# Altium PCB FPv1.3.2.PcbDoc (part 6 of 9)
Units mm, origin at the board's own origin, x right, y up, seen from the top; angles counter-clockwise.
Board outline 81.28 x 53.34 mm, 4 copper layers (Top Layer, GROUND PLANE, POWER PLANE, Bottom Layer); 98 components, 183 nets, 614 pads, 312 vias.
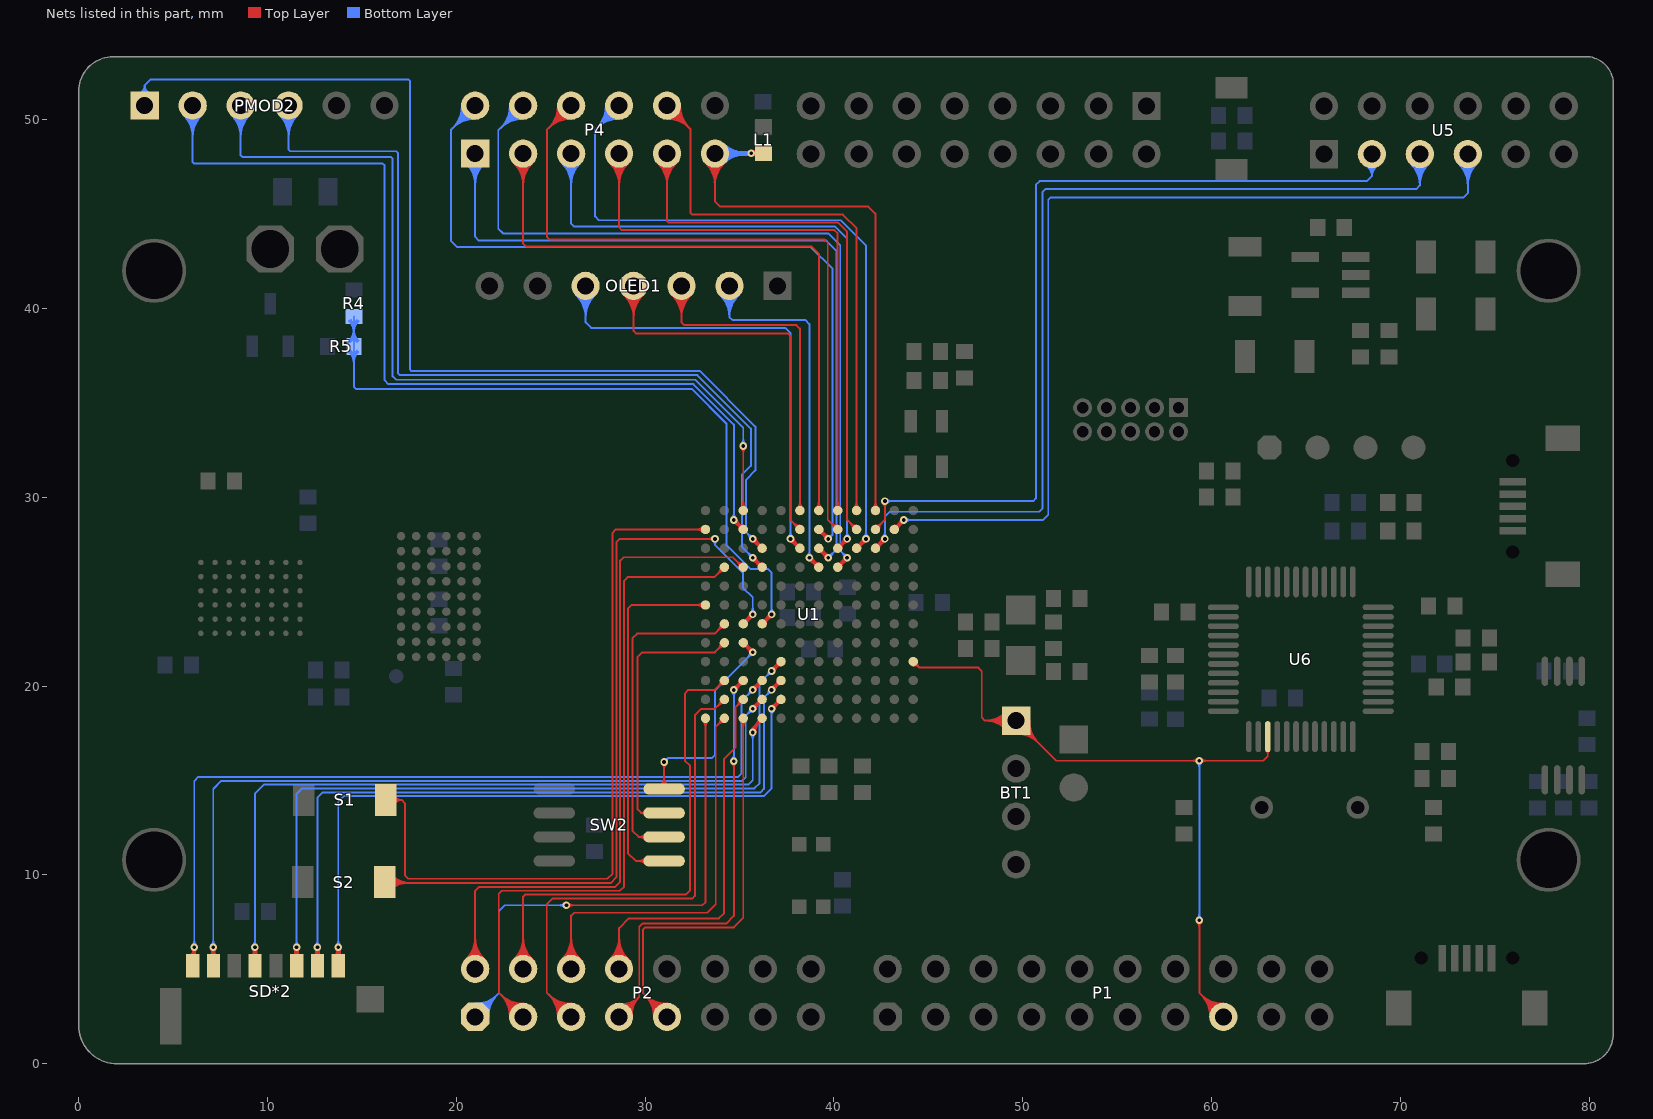
[diagram p8: the nets of this part, all layers, seen from the top]

## Via types
v1: diameter 0.403, hole 0.2, Top Layer to Bottom Layer, tented both sides, 261 vias
v2: diameter 0.503, hole 0.3, Top Layer to Bottom Layer, tented both sides, 25 vias
v3: diameter 0.6, hole 0.4, Top Layer to Bottom Layer, tented both sides, 11 vias
v4: diameter 0.508, hole 0.33, Top Layer to Bottom Layer, tented both sides, 5 vias
v5: diameter 0.703, hole 0.4, Top Layer to Bottom Layer, tented both sides, 3 vias
v6: diameter 0.603, hole 0.4, Top Layer to Bottom Layer, tented both sides, 2 vias
v7: diameter 0.503, hole 0.25, Top Layer to Bottom Layer, tented both sides, 2 vias
v8: diameter 0.6, hole 0.24, Top Layer to Bottom Layer, tented both sides, 1 vias
v9: diameter 0.508, hole 0.349, Top Layer to Bottom Layer, tented both sides, 1 vias
v10: diameter 0.603, hole 0.3, Top Layer to Bottom Layer, tented both sides, 1 vias

## Nets (pads, with @x,y where several pads share a name; then routed paths per layer and width w, separated by ;. In a path a pad name is that pad's centre, name@x,y a point inside that pad or via, vN(x,y) a via of type N, cw(c..) or ccw(c..) an arc to the next point about the centre after c; other vN are vias at no path point) (continued)
PTA15: U1.L11 U5.7 | length 62
  Top Layer w0.102: U1.L11@43.2,28.3 v1(43.7,28.8) ; U1.L11@43.2,28.499 ccw(c43.2,28.98) 43.54,28.64 ccw(c43.88,28.3) U1.L11@43.399,28.3 ; U1.L11@43.295,28.499 ccw(c43.018,28.979) v1@43.554,28.838 ; U1.L11@43.399,28.395 cw(c43.879,28.118) v1@43.738,28.654 ; 43.506,28.62 ccw(c43.349,28.892) v1@43.653,28.812 ; 43.511,28.623 ccw(c43.458,28.715) v1@43.558,28.75 ; 43.52,28.606 cw(c43.792,28.449) v1@43.712,28.753 ; 43.523,28.611 cw(c43.615,28.558) v1@43.65,28.658 ; v1@43.549,28.8 cw(c43.185,28.8) 43.443,28.543 cw(c43.7,28.285) v1@43.7,28.649 ; 43.537,28.638 cw(c43.619,28.496) 43.661,28.654 ccw(c43.619,28.496) 43.537,28.638 ; 43.538,28.637 ccw(c43.396,28.719) 43.554,28.761 cw(c43.396,28.719) 43.538,28.637
  Bottom Layer w0.102: v1(43.7,28.8) 51.076,28.8 51.35,29.074 51.35,45.762 51.463,45.875 73.332,45.875 73.57,46.113 U5.7@73.57,48.175 ; v1@43.807,28.693 cw(c44.064,28.436) 44.064,28.8 cw(c44.064,29.164) v1@43.807,28.907 ; U5.7@73.076,47.681 cw(c71.882,46.487) 73.57,46.487 cw(c75.258,46.487) U5.7@74.064,47.681 ; U5.7@73.147,47.752 cw(c72.127,46.732) 73.57,46.732 cw(c75.013,46.732) U5.7@73.993,47.752 ; U5.7@73.219,47.824 cw(c72.373,46.978) 73.57,46.978 cw(c74.767,46.978) U5.7@73.921,47.824 ; U5.7@73.291,47.896 cw(c72.618,47.223) 73.57,47.223 cw(c74.522,47.223) U5.7@73.849,47.896
PTA16: U1.K10 U5.5 | length 61.1
  Top Layer w0.102: U1.K10@42.2,27.3 v1(42.7,27.8) ; U1.K10@42.2,27.499 ccw(c42.2,27.98) 42.54,27.64 ccw(c42.88,27.3) U1.K10@42.399,27.3 ; U1.K10@42.295,27.499 ccw(c42.018,27.979) v1@42.554,27.838 ; U1.K10@42.399,27.395 cw(c42.879,27.118) v1@42.738,27.654 ; 42.506,27.62 ccw(c42.349,27.892) v1@42.653,27.812 ; 42.511,27.623 ccw(c42.458,27.715) v1@42.558,27.75 ; 42.52,27.606 cw(c42.792,27.449) v1@42.712,27.753 ; 42.523,27.611 cw(c42.615,27.558) v1@42.65,27.658 ; v1@42.549,27.8 cw(c42.185,27.8) 42.443,27.543 cw(c42.7,27.285) v1@42.7,27.649 ; 42.537,27.638 cw(c42.619,27.496) 42.661,27.654 ccw(c42.619,27.496) 42.537,27.638 ; 42.538,27.637 ccw(c42.396,27.719) 42.554,27.761 cw(c42.396,27.719) 42.538,27.637
  Bottom Layer w0.102: v1@42.593,27.907 ccw(c42.336,28.164) 42.7,28.164 ccw(c43.064,28.164) v1@42.807,27.907 ; v1(42.7,27.8) 42.7,28.984 42.951,29.235 50.876,29.235 51.054,29.413 51.054,46.177 51.202,46.325 70.836,46.325 71.03,46.519 ; U5.5@70.542,47.674 cw(c69.419,46.519) 71.03,46.519 ; U5.5@70.613,47.747 cw(c69.653,46.76) 71.03,46.76 cw(c72.407,46.76) U5.5@71.447,47.747 ; U5.5@70.684,47.82 cw(c69.887,47) 71.03,47 cw(c72.173,47) U5.5@71.376,47.82 ; U5.5@70.755,47.892 cw(c70.121,47.241) 71.03,47.241 cw(c71.939,47.241) U5.5@71.305,47.892 ; U5.5@71.03,48.175 71.03,46.519 ; U5.5@71.518,47.674 ccw(c72.641,46.519) 71.03,46.519
PTA17: U1.K11 U5.3 | length 50.8
  Top Layer w0.102: U1.K11@42.2,28.3 42.7,28.8 v1(42.7,29.8) ; U1.K11@42.2,28.499 ccw(c42.2,28.98) 42.54,28.64 ccw(c42.88,28.3) U1.K11@42.399,28.3 ; v1@42.593,29.693 cw(c42.336,29.436) 42.7,29.436 cw(c43.064,29.436) v1@42.807,29.693
  Bottom Layer w0.102: v1(42.7,29.8) 50.552,29.8 50.7,29.948 50.7,46.56 50.89,46.75 68.225,46.75 68.49,47.015 ; v1@42.807,29.693 cw(c43.064,29.436) 43.064,29.8 cw(c43.064,30.164) v1@42.807,29.907 ; U5.3@68.163,47.557 cw(c67.877,47.015) 68.49,47.015 ; U5.3@68.211,47.647 cw(c67.966,47.184) 68.49,47.184 cw(c69.014,47.184) U5.3@68.769,47.647 ; U5.3@68.258,47.736 cw(c68.055,47.352) 68.49,47.352 cw(c68.925,47.352) U5.3@68.722,47.736 ; U5.3@68.49,48.175 68.49,47.015 ; U5.3@68.817,47.557 ccw(c69.103,47.015) 68.49,47.015
PTA24: L1.1 P4.11 U1.K12 | length 43.5
  Top Layer w0.102: P4.11@33.207,47.711 cw(c32.013,46.517) 33.701,46.517 cw(c35.389,46.517) P4.11@34.195,47.711 ; P4.11@33.278,47.782 cw(c32.258,46.762) 33.701,46.762 cw(c35.144,46.762) P4.11@34.124,47.782 ; P4.11@33.35,47.854 cw(c32.504,47.008) 33.701,47.008 cw(c34.898,47.008) P4.11@34.052,47.854 ; P4.11@33.422,47.926 cw(c32.749,47.253) 33.701,47.253 cw(c34.653,47.253) P4.11@33.98,47.926 ; P4.11@33.701,48.205 33.701,45.674 33.975,45.4 41.825,45.4 42.2,45.025 U1.K12@42.2,29.3 ; U1.K12@42.059,29.441 ccw(c41.719,29.781) 42.2,29.781 ccw(c42.681,29.781) U1.K12@42.341,29.441
  Top Layer w0.254: L1.1@36.019,48.046 ccw(c35.625,47.702) v1(35.625,48.225) ; L1.1@36.019,48.404 cw(c35.625,48.748) v1(35.625,48.225) ; L1.1@36.275,48.225 v1(35.625,48.225)
  Bottom Layer w0.254: P4.11@33.701,48.205 v1@35.605,48.205 ; P4.11@33.962,47.944 cw(c34.592,47.314) 34.592,48.205 cw(c34.592,49.096) P4.11@33.962,48.466 ; P4.11@34.142,47.764 cw(c35.205,46.701) 35.205,48.205 cw(c35.205,49.709) P4.11@34.142,48.646 ; 35.397,48.205 ccw(c35.397,48.453) v1@35.572,48.278
PTA25: P4.10 U1.J12 | length 39.3
  Top Layer w0.102: P4.10@31.161,50.046 cw(c31.161,48.358) 32.355,49.551 cw(c33.548,50.745) P4.10@31.86,50.745 ; P4.10@31.161,50.147 cw(c31.161,48.705) 32.181,49.725 cw(c33.201,50.745) P4.10@31.759,50.745 ; P4.10@31.161,50.249 cw(c31.161,49.052) 32.008,49.898 cw(c32.854,50.745) P4.10@31.657,50.745 ; P4.10@31.161,50.351 cw(c31.161,49.398) 31.834,50.072 cw(c32.508,50.745) P4.10@31.555,50.745 ; P4.10@31.161,50.745 32.4,49.506 32.4,45.075 32.5,44.975 40.475,44.975 41.2,44.25 U1.J12@41.2,29.3 ; U1.J12@41.059,29.441 ccw(c40.719,29.781) 41.2,29.781 ccw(c41.681,29.781) U1.J12@41.341,29.441
PTA26: P4.9 U1.J11 | length 38.4
  Top Layer w0.102: P4.9@30.667,47.711 cw(c29.473,46.517) 31.161,46.517 cw(c32.849,46.517) P4.9@31.655,47.711 ; P4.9@30.738,47.782 cw(c29.718,46.762) 31.161,46.762 cw(c32.604,46.762) P4.9@31.584,47.782 ; P4.9@30.81,47.854 cw(c29.964,47.008) 31.161,47.008 cw(c32.358,47.008) P4.9@31.512,47.854 ; P4.9@30.882,47.926 cw(c30.209,47.253) 31.161,47.253 cw(c32.113,47.253) P4.9@31.44,47.926 ; P4.9@31.161,48.205 31.161,44.633 31.244,44.55 40.225,44.55 40.7,44.075 40.7,28.8 U1.J11@41.2,28.3 ; U1.J11@41.001,28.3 ccw(c40.52,28.3) 40.86,28.64 ccw(c41.2,28.98) U1.J11@41.2,28.499
PTA27: P4.8 U1.J10 | length 50
  Top Layer w0.102: U1.J10@41.2,27.3 v1(41.7,27.8) ; U1.J10@41.2,27.499 ccw(c41.2,27.98) 41.54,27.64 ccw(c41.88,27.3) U1.J10@41.399,27.3 ; U1.J10@41.295,27.499 ccw(c41.018,27.979) v1@41.554,27.838 ; U1.J10@41.399,27.395 cw(c41.879,27.118) v1@41.738,27.654 ; 41.506,27.62 ccw(c41.349,27.892) v1@41.653,27.812 ; 41.511,27.623 ccw(c41.458,27.715) v1@41.558,27.75 ; 41.52,27.606 cw(c41.792,27.449) v1@41.712,27.753 ; 41.523,27.611 cw(c41.615,27.558) v1@41.65,27.658 ; v1@41.549,27.8 cw(c41.185,27.8) 41.443,27.543 cw(c41.7,27.285) v1@41.7,27.649 ; 41.537,27.638 cw(c41.619,27.496) 41.661,27.654 ccw(c41.619,27.496) 41.537,27.638 ; 41.538,27.637 ccw(c41.396,27.719) 41.554,27.761 cw(c41.396,27.719) 41.538,27.637
  Bottom Layer w0.102: P4.8@27.922,50.745 cw(c26.234,50.745) 27.427,49.551 cw(c28.621,48.358) P4.8@28.621,50.046 ; P4.8@28.023,50.745 cw(c26.581,50.745) 27.601,49.725 cw(c28.621,48.705) P4.8@28.621,50.147 ; P4.8@28.125,50.745 cw(c26.928,50.745) 27.774,49.898 cw(c28.621,49.052) P4.8@28.621,50.249 ; P4.8@28.227,50.745 cw(c27.274,50.745) 27.948,50.072 cw(c28.621,49.398) P4.8@28.621,50.351 ; P4.8@28.621,50.745 27.35,49.474 27.35,44.875 27.55,44.675 40.35,44.675 41.7,43.325 v1(41.7,27.8) ; v1@41.593,27.907 ccw(c41.336,28.164) 41.7,28.164 ccw(c42.064,28.164) v1@41.807,27.907
PTA28: P4.7 U1.H12 | length 39.3
  Top Layer w0.102: P4.7@28.127,47.711 cw(c26.933,46.517) 28.621,46.517 cw(c30.309,46.517) P4.7@29.115,47.711 ; P4.7@28.198,47.782 cw(c27.178,46.762) 28.621,46.762 cw(c30.064,46.762) P4.7@29.044,47.782 ; P4.7@28.27,47.854 cw(c27.424,47.008) 28.621,47.008 cw(c29.818,47.008) P4.7@28.972,47.854 ; P4.7@28.342,47.926 cw(c27.669,47.253) 28.621,47.253 cw(c29.573,47.253) P4.7@28.9,47.926 ; P4.7@28.621,48.205 28.621,44.304 28.775,44.15 40.025,44.15 40.2,43.975 U1.H12@40.2,29.3 ; U1.H12@40.059,29.441 ccw(c39.719,29.781) 40.2,29.781 ccw(c40.681,29.781) U1.H12@40.341,29.441
PTA29: P4.6 U1.H11 | length 46.9
  Top Layer w0.102: P4.6@25.382,50.745 cw(c23.694,50.745) 24.887,49.551 cw(c26.081,48.358) P4.6@26.081,50.046 ; P4.6@25.483,50.745 cw(c24.041,50.745) 25.061,49.725 cw(c26.081,48.705) P4.6@26.081,50.147 ; P4.6@25.585,50.745 cw(c24.388,50.745) 25.234,49.898 cw(c26.081,49.052) P4.6@26.081,50.249 ; P4.6@25.687,50.745 cw(c24.734,50.745) 25.408,50.072 cw(c26.081,49.398) P4.6@26.081,50.351 ; P4.6@26.081,50.745 24.8,49.464 24.8,43.805 24.955,43.65 39.5,43.65 39.675,43.475 39.675,28.825 U1.H11@40.2,28.3 ; U1.H11@40.001,28.3 ccw(c39.52,28.3) 39.86,28.64 ccw(c40.2,28.98) U1.H11@40.2,28.499
PTB0: P4.5 U1.H10 | length 47.6
  Top Layer w0.102: U1.H10@40.2,27.3 v1(40.7,27.8) ; U1.H10@40.2,27.499 ccw(c40.2,27.98) 40.54,27.64 ccw(c40.88,27.3) U1.H10@40.399,27.3 ; U1.H10@40.295,27.499 ccw(c40.018,27.979) v1@40.554,27.838 ; U1.H10@40.399,27.395 cw(c40.879,27.118) v1@40.738,27.654 ; 40.506,27.62 ccw(c40.349,27.892) v1@40.653,27.812 ; 40.511,27.623 ccw(c40.458,27.715) v1@40.558,27.75 ; 40.52,27.606 cw(c40.792,27.449) v1@40.712,27.753 ; 40.523,27.611 cw(c40.615,27.558) v1@40.65,27.658 ; v1@40.549,27.8 cw(c40.185,27.8) 40.443,27.543 cw(c40.7,27.285) v1@40.7,27.649 ; 40.537,27.638 cw(c40.619,27.496) 40.661,27.654 ccw(c40.619,27.496) 40.537,27.638 ; 40.538,27.637 ccw(c40.396,27.719) 40.554,27.761 cw(c40.396,27.719) 40.538,27.637
  Bottom Layer w0.102: P4.5@25.587,47.711 cw(c24.393,46.517) 26.081,46.517 cw(c27.769,46.517) P4.5@26.575,47.711 ; P4.5@25.658,47.782 cw(c24.638,46.762) 26.081,46.762 cw(c27.524,46.762) P4.5@26.504,47.782 ; P4.5@25.73,47.854 cw(c24.884,47.008) 26.081,47.008 cw(c27.278,47.008) P4.5@26.432,47.854 ; P4.5@25.802,47.926 cw(c25.129,47.253) 26.081,47.253 cw(c27.033,47.253) P4.5@26.36,47.926 ; P4.5@26.081,48.205 26.081,44.494 26.225,44.35 40.05,44.35 40.7,43.7 v1(40.7,27.8) ; v1@40.593,27.907 ccw(c40.336,28.164) 40.7,28.164 ccw(c41.064,28.164) v1@40.807,27.907
PTB1: P4.4 U1.H9 | length 55.3
  Top Layer w0.102: U1.H9@40.2,26.3 v1(40.7,26.8) ; U1.H9@40.2,26.499 ccw(c40.2,26.98) 40.54,26.64 ccw(c40.88,26.3) U1.H9@40.399,26.3 ; U1.H9@40.295,26.499 ccw(c40.018,26.979) v1@40.554,26.838 ; U1.H9@40.399,26.395 cw(c40.879,26.118) v1@40.738,26.654 ; 40.506,26.62 ccw(c40.349,26.892) v1@40.653,26.812 ; 40.511,26.623 ccw(c40.458,26.715) v1@40.558,26.75 ; 40.52,26.606 cw(c40.792,26.449) v1@40.712,26.753 ; 40.523,26.611 cw(c40.615,26.558) v1@40.65,26.658 ; v1@40.549,26.8 cw(c40.185,26.8) 40.443,26.543 cw(c40.7,26.285) v1@40.7,26.649 ; 40.537,26.638 cw(c40.619,26.496) 40.661,26.654 ccw(c40.619,26.496) 40.537,26.638 ; 40.538,26.637 ccw(c40.396,26.719) 40.554,26.761 cw(c40.396,26.719) 40.538,26.637
  Bottom Layer w0.102: P4.4@22.842,50.745 cw(c21.154,50.745) 22.347,49.551 cw(c23.541,48.358) P4.4@23.541,50.046 ; P4.4@22.943,50.745 cw(c21.501,50.745) 22.521,49.725 cw(c23.541,48.705) P4.4@23.541,50.147 ; P4.4@23.045,50.745 cw(c21.848,50.745) 22.694,49.898 cw(c23.541,49.052) P4.4@23.541,50.249 ; P4.4@23.147,50.745 cw(c22.194,50.745) 22.868,50.072 cw(c23.541,49.398) P4.4@23.541,50.351 ; P4.4@23.541,50.745 22.225,49.429 22.225,44.225 22.475,43.975 39.7,43.975 40.335,43.34 40.335,27.165 v1(40.7,26.8) ; v1@40.549,26.8 ccw(c40.185,26.8) 40.443,27.057 ccw(c40.7,27.315) v1@40.7,26.951
PTB2: P4.3 U1.G12 | length 43.3
  Top Layer w0.102: P4.3@23.047,47.711 cw(c21.853,46.517) 23.541,46.517 cw(c25.229,46.517) P4.3@24.035,47.711 ; P4.3@23.118,47.782 cw(c22.098,46.762) 23.541,46.762 cw(c24.984,46.762) P4.3@23.964,47.782 ; P4.3@23.19,47.854 cw(c22.344,47.008) 23.541,47.008 cw(c24.738,47.008) P4.3@23.892,47.854 ; P4.3@23.262,47.926 cw(c22.589,47.253) 23.541,47.253 cw(c24.493,47.253) P4.3@23.82,47.926 ; P4.3@23.541,48.205 23.541,43.439 23.705,43.275 38.825,43.275 39.2,42.9 U1.G12@39.2,29.3 ; U1.G12@39.059,29.441 ccw(c38.719,29.781) 39.2,29.781 ccw(c39.681,29.781) U1.G12@39.341,29.441
PTB3: P4.2 U1.G11 | length 55.9
  Top Layer w0.102: U1.G11@39.2,28.101 cw(c39.2,27.62) 39.54,27.96 cw(c39.88,28.3) U1.G11@39.399,28.3 ; U1.G11@39.2,28.3 v1(39.7,27.8) ; U1.G11@39.295,28.101 cw(c39.018,27.621) v1@39.554,27.762 ; U1.G11@39.399,28.205 ccw(c39.879,28.482) v1@39.738,27.946 ; 39.506,27.98 cw(c39.349,27.708) v1@39.653,27.788 ; 39.511,27.977 cw(c39.458,27.885) v1@39.558,27.85 ; 39.52,27.994 ccw(c39.792,28.151) v1@39.712,27.847 ; 39.523,27.989 ccw(c39.615,28.042) v1@39.65,27.942 ; v1@39.549,27.8 ccw(c39.185,27.8) 39.443,28.057 ccw(c39.7,28.315) v1@39.7,27.951 ; 39.537,27.962 ccw(c39.619,28.104) 39.661,27.946 cw(c39.619,28.104) 39.537,27.962 ; 39.538,27.963 cw(c39.396,27.881) 39.554,27.839 ccw(c39.396,27.881) 39.538,27.963
  Bottom Layer w0.102: P4.2@20.302,50.745 cw(c18.614,50.745) 19.807,49.551 cw(c21.001,48.358) P4.2@21.001,50.046 ; P4.2@20.403,50.745 cw(c18.961,50.745) 19.981,49.725 cw(c21.001,48.705) P4.2@21.001,50.147 ; P4.2@20.505,50.745 cw(c19.308,50.745) 20.154,49.898 cw(c21.001,49.052) P4.2@21.001,50.249 ; P4.2@20.607,50.745 cw(c19.654,50.745) 20.328,50.072 cw(c21.001,49.398) P4.2@21.001,50.351 ; P4.2@21.001,50.745 19.725,49.469 19.725,43.575 20.05,43.25 38.775,43.25 39.929,42.096 39.929,28.029 ; v1(39.7,27.8) 39.929,28.029 ; v1@39.713,27.95 ccw(c39.736,28.221) 39.929,28.029 ; v1@39.85,27.813 cw(c40.121,27.836) 39.929,28.029
PTB4: P4.1 U1.G10 | length 53.4
  Top Layer w0.102: U1.G10@39.2,27.101 cw(c39.2,26.62) 39.54,26.96 cw(c39.88,27.3) U1.G10@39.399,27.3 ; U1.G10@39.2,27.3 v1(39.7,26.8) ; U1.G10@39.295,27.101 cw(c39.018,26.621) v1@39.554,26.762 ; U1.G10@39.399,27.205 ccw(c39.879,27.482) v1@39.738,26.946 ; 39.506,26.98 cw(c39.349,26.708) v1@39.653,26.788 ; 39.511,26.977 cw(c39.458,26.885) v1@39.558,26.85 ; 39.52,26.994 ccw(c39.792,27.151) v1@39.712,26.847 ; 39.523,26.989 ccw(c39.615,27.042) v1@39.65,26.942 ; v1@39.549,26.8 ccw(c39.185,26.8) 39.443,27.057 ccw(c39.7,27.315) v1@39.7,26.951 ; 39.537,26.962 ccw(c39.619,27.104) 39.661,26.946 cw(c39.619,27.104) 39.537,26.962 ; 39.538,26.963 cw(c39.396,26.881) 39.554,26.839 ccw(c39.396,26.881) 39.538,26.963
  Bottom Layer w0.102: P4.1@20.507,47.711 cw(c19.313,46.517) 21.001,46.517 cw(c22.689,46.517) P4.1@21.495,47.711 ; P4.1@20.578,47.782 cw(c19.558,46.762) 21.001,46.762 cw(c22.444,46.762) P4.1@21.424,47.782 ; P4.1@20.65,47.854 cw(c19.804,47.008) 21.001,47.008 cw(c22.198,47.008) P4.1@21.352,47.854 ; P4.1@20.722,47.926 cw(c20.049,47.253) 21.001,47.253 cw(c21.953,47.253) P4.1@21.28,47.926 ; P4.1@21.001,48.205 21.001,43.799 21.2,43.6 39.6,43.6 40.132,43.068 40.132,27.232 v1(39.7,26.8) ; v1@39.7,26.951 ccw(c39.7,27.315) 39.957,27.057 ccw(c40.215,26.8) v1@39.851,26.8
PTB5: OLED1.2 U1.G9 | length 31.2
  Top Layer w0.102: v1@38.662,26.654 cw(c38.521,26.118) U1.G9@39.001,26.395 ; v1@38.688,26.753 cw(c38.608,26.449) 38.88,26.606 ; v1@38.7,26.649 cw(c38.7,26.285) 38.957,26.543 cw(c39.215,26.8) v1@38.851,26.8 ; v1(38.7,26.8) U1.G9@39.2,26.3 ; v1@38.747,26.812 ccw(c39.051,26.892) 38.894,26.62 ; v1@38.75,26.658 cw(c38.785,26.558) 38.877,26.611 ; v1@38.842,26.75 ccw(c38.942,26.715) 38.889,26.623 ; v1@38.846,26.838 ccw(c39.382,26.979) U1.G9@39.105,26.499 ; U1.G9@39.001,26.3 ccw(c38.52,26.3) 38.86,26.64 ccw(c39.2,26.98) U1.G9@39.2,26.499 ; v1@38.739,26.654 cw(c38.781,26.496) 38.863,26.638 ccw(c38.781,26.496) v1@38.739,26.654 ; v1@38.846,26.761 ccw(c39.004,26.719) 38.862,26.637 cw(c39.004,26.719) v1@38.846,26.761
  Bottom Layer w0.102: OLED1.2@33.981,40.697 cw(c32.868,39.548) 34.468,39.548 ; OLED1.2@34.052,40.77 cw(c33.101,39.788) 34.468,39.788 cw(c35.835,39.788) OLED1.2@34.884,40.77 ; OLED1.2@34.123,40.843 cw(c33.333,40.028) 34.468,40.028 cw(c35.602,40.028) OLED1.2@34.813,40.843 ; OLED1.2@34.193,40.916 cw(c33.566,40.268) 34.468,40.268 cw(c35.37,40.268) OLED1.2@34.742,40.916 ; OLED1.2@34.468,41.199 34.468,39.548 ; OLED1.2@34.954,40.697 ccw(c36.067,39.548) 34.468,39.548 ; v1@38.593,26.907 ccw(c38.336,27.164) 38.7,27.164 ccw(c39.064,27.164) v1@38.807,26.907 ; v1(38.7,26.8) 38.7,39.175 38.475,39.4 34.616,39.4 34.468,39.548
PTB6: OLED1.3 U1.F12 | length 27
  Top Layer w0.102: OLED1.3@31.433,40.704 cw(c30.24,39.511) 31.928,39.511 cw(c33.616,39.511) OLED1.3@32.422,40.704 ; OLED1.3@31.505,40.776 cw(c30.485,39.756) 31.928,39.756 cw(c33.371,39.756) OLED1.3@32.35,40.776 ; OLED1.3@31.577,40.848 cw(c30.73,40.001) 31.928,40.001 cw(c33.125,40.001) OLED1.3@32.279,40.848 ; OLED1.3@31.649,40.92 cw(c30.976,40.247) 31.928,40.247 cw(c32.88,40.247) OLED1.3@32.207,40.92 ; OLED1.3@31.928,41.199 31.928,39.268 32.071,39.125 38.015,39.125 38.2,38.94 U1.F12@38.2,29.3 ; U1.F12@38.059,29.441 ccw(c37.719,29.781) 38.2,29.781 ccw(c38.681,29.781) U1.F12@38.341,29.441
PTB7: OLED1.4 U1.F11 | length 30.3
  Top Layer w0.102: OLED1.4@28.893,40.704 cw(c27.7,39.511) 29.388,39.511 cw(c31.076,39.511) OLED1.4@29.882,40.704 ; OLED1.4@28.965,40.776 cw(c27.945,39.756) 29.388,39.756 cw(c30.831,39.756) OLED1.4@29.81,40.776 ; OLED1.4@29.037,40.848 cw(c28.19,40.001) 29.388,40.001 cw(c30.585,40.001) OLED1.4@29.739,40.848 ; OLED1.4@29.109,40.92 cw(c28.436,40.247) 29.388,40.247 cw(c30.34,40.247) OLED1.4@29.667,40.92 ; OLED1.4@29.388,41.199 29.388,38.811 29.524,38.675 37.576,38.675 37.7,38.551 37.7,28.8 U1.F11@38.2,28.3 ; U1.F11@38.001,28.3 ccw(c37.52,28.3) 37.86,28.64 ccw(c38.2,28.98) U1.F11@38.2,28.499
PTB8: OLED1.5 U1.F10 | length 37
  Top Layer w0.102: v1@37.662,27.654 cw(c37.521,27.118) U1.F10@38.001,27.395 ; v1@37.688,27.753 cw(c37.608,27.449) 37.88,27.606 ; v1@37.7,27.649 cw(c37.7,27.285) 37.957,27.543 cw(c38.215,27.8) v1@37.851,27.8 ; v1(37.7,27.8) U1.F10@38.2,27.3 ; v1@37.747,27.812 ccw(c38.051,27.892) 37.894,27.62 ; v1@37.75,27.658 cw(c37.785,27.558) 37.877,27.611 ; v1@37.842,27.75 ccw(c37.942,27.715) 37.889,27.623 ; v1@37.846,27.838 ccw(c38.382,27.979) U1.F10@38.105,27.499 ; U1.F10@38.001,27.3 ccw(c37.52,27.3) 37.86,27.64 ccw(c38.2,27.98) U1.F10@38.2,27.499 ; v1@37.739,27.654 cw(c37.781,27.496) 37.863,27.638 ccw(c37.781,27.496) v1@37.739,27.654 ; v1@37.846,27.761 ccw(c38.004,27.719) 37.862,27.637 cw(c38.004,27.719) v1@37.846,27.761
  Bottom Layer w0.102: OLED1.5@26.353,40.704 cw(c25.16,39.511) 26.848,39.511 cw(c28.536,39.511) OLED1.5@27.342,40.704 ; OLED1.5@26.425,40.776 cw(c25.405,39.756) 26.848,39.756 cw(c28.291,39.756) OLED1.5@27.27,40.776 ; OLED1.5@26.497,40.848 cw(c25.65,40.001) 26.848,40.001 cw(c28.045,40.001) OLED1.5@27.199,40.848 ; OLED1.5@26.569,40.92 cw(c25.896,40.247) 26.848,40.247 cw(c27.8,40.247) OLED1.5@27.127,40.92 ; OLED1.5@26.848,41.199 26.848,39.268 27.141,38.975 37.428,38.975 37.7,38.703 v1(37.7,27.8) ; v1@37.593,27.907 ccw(c37.336,28.164) 37.7,28.164 ccw(c38.064,28.164) v1@37.807,27.907
PTB20: PMOD2.1 U1.D10 | length 64
  Top Layer w0.102: v1@35.662,27.654 cw(c35.521,27.118) U1.D10@36.001,27.395 ; v1@35.688,27.753 cw(c35.608,27.449) 35.88,27.606 ; v1@35.7,27.649 cw(c35.7,27.285) 35.957,27.543 cw(c36.215,27.8) v1@35.851,27.8 ; v1(35.7,27.8) U1.D10@36.2,27.3 ; v1@35.747,27.812 ccw(c36.051,27.892) 35.894,27.62 ; v1@35.75,27.658 cw(c35.785,27.558) 35.877,27.611 ; v1@35.842,27.75 ccw(c35.942,27.715) 35.889,27.623 ; v1@35.846,27.838 ccw(c36.382,27.979) U1.D10@36.105,27.499 ; U1.D10@36.001,27.3 ccw(c35.52,27.3) 35.86,27.64 ccw(c36.2,27.98) U1.D10@36.2,27.499 ; v1@35.739,27.654 cw(c35.781,27.496) 35.863,27.638 ccw(c35.781,27.496) v1@35.739,27.654 ; v1@35.846,27.761 ccw(c36.004,27.719) 35.862,27.637 cw(c36.004,27.719) v1@35.846,27.761
  Bottom Layer w0.102: PMOD2.1@3.217,51.389 ccw(c3.023,51.825) 3.5,51.825 ; PMOD2.1@3.258,51.296 ccw(c3.093,51.669) 3.5,51.669 ccw(c3.907,51.669) PMOD2.1@3.742,51.296 ; PMOD2.1@3.299,51.203 ccw(c3.162,51.513) 3.5,51.513 ccw(c3.838,51.513) PMOD2.1@3.701,51.203 ; PMOD2.1@3.5,50.75 3.5,51.825 ; PMOD2.1@3.783,51.389 cw(c3.977,51.825) 3.5,51.825 ; v1@35.549,27.8 ccw(c35.185,27.8) 35.443,28.057 ccw(c35.7,28.315) v1@35.7,27.951 ; v1(35.7,27.8) 35.346,28.154 35.346,30.926 35.846,31.426 35.846,33.75 32.896,36.7 17.605,36.7 17.55,36.755 17.55,52.046 17.471,52.125 3.8,52.125 3.5,51.825
PTB21: PMOD2.4 U1.D9 | length 60.1
  Top Layer w0.102: v1@35.662,26.654 cw(c35.521,26.118) U1.D9@36.001,26.395 ; v1@35.688,26.753 cw(c35.608,26.449) 35.88,26.606 ; v1@35.7,26.649 cw(c35.7,26.285) 35.957,26.543 cw(c36.215,26.8) v1@35.851,26.8 ; v1(35.7,26.8) U1.D9@36.2,26.3 ; v1@35.747,26.812 ccw(c36.051,26.892) 35.894,26.62 ; v1@35.75,26.658 cw(c35.785,26.558) 35.877,26.611 ; v1@35.842,26.75 ccw(c35.942,26.715) 35.889,26.623 ; v1@35.846,26.838 ccw(c36.382,26.979) U1.D9@36.105,26.499 ; U1.D9@36.001,26.3 ccw(c35.52,26.3) 35.86,26.64 ccw(c36.2,26.98) U1.D9@36.2,26.499 ; v1@35.739,26.654 cw(c35.781,26.496) 35.863,26.638 ccw(c35.781,26.496) v1@35.739,26.654 ; v1@35.846,26.761 ccw(c36.004,26.719) 35.862,26.637 cw(c36.004,26.719) v1@35.846,26.761
  Bottom Layer w0.102: PMOD2.4@10.626,50.256 cw(c9.432,49.062) 11.12,49.062 cw(c12.808,49.062) PMOD2.4@11.614,50.256 ; PMOD2.4@10.697,50.327 cw(c9.677,49.307) 11.12,49.307 cw(c12.563,49.307) PMOD2.4@11.543,50.327 ; PMOD2.4@10.769,50.399 cw(c9.923,49.553) 11.12,49.553 cw(c12.317,49.553) PMOD2.4@11.471,50.399 ; PMOD2.4@10.841,50.471 cw(c10.168,49.798) 11.12,49.798 cw(c12.072,49.798) PMOD2.4@11.399,50.471 ; PMOD2.4@11.12,50.75 11.12,48.418 11.209,48.328 16.823,48.328 16.925,48.226 16.925,36.567 17.017,36.475 32.765,36.475 35.6,33.64 35.6,31.663 35.128,31.191 35.128,27.372 v1(35.7,26.8) ; v1@35.549,26.8 ccw(c35.185,26.8) 35.443,27.057 ccw(c35.7,27.315) v1@35.7,26.951
PTB22: PMOD2.3 U1.C12 | length 56.6
  Top Layer w0.102: U1.C12@35.059,29.441 ccw(c34.719,29.781) 35.2,29.781 ccw(c35.681,29.781) U1.C12@35.341,29.441 ; v1@35.093,32.613 cw(c34.836,32.356) 35.2,32.356 cw(c35.564,32.356) v1@35.307,32.613 ; U1.C12@35.2,29.3 v1(35.2,32.72)
  Bottom Layer w0.102: PMOD2.3@8.086,50.256 cw(c6.892,49.062) 8.58,49.062 cw(c10.268,49.062) PMOD2.3@9.074,50.256 ; PMOD2.3@8.157,50.327 cw(c7.137,49.307) 8.58,49.307 cw(c10.023,49.307) PMOD2.3@9.003,50.327 ; PMOD2.3@8.229,50.399 cw(c7.383,49.553) 8.58,49.553 cw(c9.777,49.553) PMOD2.3@8.931,50.399 ; PMOD2.3@8.301,50.471 cw(c7.628,49.798) 8.58,49.798 cw(c9.532,49.798) PMOD2.3@8.859,50.471 ; PMOD2.3@8.58,50.75 8.58,48.113 8.668,48.025 16.542,48.025 16.625,47.942 16.625,36.41 16.81,36.225 32.66,36.225 35.2,33.685 v1(35.2,32.72) ; v1@35.093,32.826 ccw(c34.836,33.083) 35.2,33.083 ccw(c35.564,33.083) v1@35.307,32.826
PTB23: PMOD2.2 U1.C11 | length 62.2
  Top Layer w0.102: v1@34.662,28.654 cw(c34.521,28.118) U1.C11@35.001,28.395 ; v1@34.688,28.753 cw(c34.608,28.449) 34.88,28.606 ; v1@34.7,28.649 cw(c34.7,28.285) 34.957,28.543 cw(c35.215,28.8) v1@34.851,28.8 ; v1(34.7,28.8) U1.C11@35.2,28.3 ; v1@34.747,28.812 ccw(c35.051,28.892) 34.894,28.62 ; v1@34.75,28.658 cw(c34.785,28.558) 34.877,28.611 ; v1@34.842,28.75 ccw(c34.942,28.715) 34.889,28.623 ; v1@34.846,28.838 ccw(c35.382,28.979) U1.C11@35.105,28.499 ; U1.C11@35.001,28.3 ccw(c34.52,28.3) 34.86,28.64 ccw(c35.2,28.98) U1.C11@35.2,28.499 ; v1@34.739,28.654 cw(c34.781,28.496) 34.863,28.638 ccw(c34.781,28.496) v1@34.739,28.654 ; v1@34.846,28.761 ccw(c35.004,28.719) 34.862,28.637 cw(c35.004,28.719) v1@34.846,28.761
  Bottom Layer w0.102: PMOD2.2@5.546,50.256 cw(c4.352,49.062) 6.04,49.062 cw(c7.728,49.062) PMOD2.2@6.534,50.256 ; PMOD2.2@5.617,50.327 cw(c4.597,49.307) 6.04,49.307 cw(c7.483,49.307) PMOD2.2@6.463,50.327 ; PMOD2.2@5.689,50.399 cw(c4.843,49.553) 6.04,49.553 cw(c7.237,49.553) PMOD2.2@6.391,50.399 ; PMOD2.2@5.761,50.471 cw(c5.088,49.798) 6.04,49.798 cw(c6.992,49.798) PMOD2.2@6.319,50.471 ; PMOD2.2@6.04,50.75 6.04,47.757 6.122,47.675 16.104,47.675 16.2,47.579 16.2,36.2 16.4,36 32.555,36 34.7,33.855 v1(34.7,28.8) ; v1@34.593,28.907 ccw(c34.336,29.164) 34.7,29.164 ccw(c35.064,29.164) v1@34.807,28.907
PTC3: S1.1 U1.A11 | length 41.5
  Top Layer w0.102: S1.1@16.266,13.975 17.1,13.975 ; S1.1@16.647,13.792 cw(c16.938,13.651) 16.938,13.975 cw(c16.938,14.299) S1.1@16.647,14.158 ; S1.1@16.738,13.748 cw(c17.1,13.574) 17.1,13.975 ; S1.1@16.738,14.202 ccw(c17.1,14.376) 17.1,13.975 ; U1.A11@33.059,28.159 ccw(c32.719,27.819) 32.719,28.3 ccw(c32.719,28.781) U1.A11@33.059,28.441 ; U1.A11@33.2,28.3 28.452,28.3 28.275,28.123 28.275,10.075 28,9.8 17.45,9.8 17.275,9.975 17.275,13.8 17.1,13.975
PTC12: SW2.5 U1.A7 | length 21.5
  Top Layer w0.102: SW2.5@30.032,10.569 ccw(c29.606,10.143) 29.606,10.745 ccw(c29.606,11.347) SW2.5@30.032,10.921 ; SW2.5@30.104,10.641 ccw(c29.852,10.389) 29.852,10.745 ccw(c29.852,11.101) SW2.5@30.104,10.849 ; SW2.5@31.008,10.745 29.505,10.745 29.088,11.162 29.088,24.103 29.285,24.3 U1.A7@33.2,24.3 ; U1.A7@33.059,24.159 ccw(c32.719,23.819) 32.719,24.3 ccw(c32.719,24.781) U1.A7@33.059,24.441
PTC13: R4.2 R5.2 U1.D6 | length 47.5
  Top Layer w0.102: U1.D6@36.2,23.3 v1(36.7,23.8) ; U1.D6@36.2,23.499 ccw(c36.2,23.98) 36.54,23.64 ccw(c36.88,23.3) U1.D6@36.399,23.3 ; U1.D6@36.295,23.499 ccw(c36.018,23.979) v1@36.554,23.838 ; U1.D6@36.399,23.395 cw(c36.879,23.118) v1@36.738,23.654 ; 36.506,23.62 ccw(c36.349,23.892) v1@36.653,23.812 ; 36.511,23.623 ccw(c36.458,23.715) v1@36.558,23.75 ; 36.52,23.606 cw(c36.792,23.449) v1@36.712,23.753 ; 36.523,23.611 cw(c36.615,23.558) v1@36.65,23.658 ; v1@36.549,23.8 cw(c36.185,23.8) 36.443,23.543 cw(c36.7,23.285) v1@36.7,23.649 ; 36.537,23.638 cw(c36.619,23.496) 36.661,23.654 ccw(c36.619,23.496) 36.537,23.638 ; 36.538,23.637 ccw(c36.396,23.719) 36.554,23.761 cw(c36.396,23.719) 36.538,23.637
  Bottom Layer w0.102: R5.2@14.328,37.703 cw(c13.732,37.107) 14.575,37.107 cw(c15.418,37.107) R5.2@14.822,37.703 ; R5.2@14.328,38.297 ccw(c13.732,38.893) 14.575,38.893 ccw(c15.418,38.893) R5.2@14.822,38.297 ; R4.2@14.328,39.328 cw(c13.732,38.732) 14.575,38.732 cw(c15.418,38.732) R4.2@14.822,39.328 ; R5.2@14.4,37.775 cw(c13.977,37.352) 14.575,37.352 cw(c15.173,37.352) R5.2@14.75,37.775 ; R5.2@14.4,38.225 ccw(c13.977,38.648) 14.575,38.648 ccw(c15.173,38.648) R5.2@14.75,38.225 ; R4.2@14.4,39.4 cw(c13.977,38.977) 14.575,38.977 cw(c15.173,38.977) R4.2@14.75,39.4 ; R4.2@14.575,39.575 14.575,35.844 14.681,35.738 32.461,35.738 34.315,33.884 34.315,27.472 35.575,26.213 36.5,26.213 36.7,26.013 v1(36.7,23.8) ; v1@36.593,23.907 ccw(c36.336,24.164) 36.7,24.164 ccw(c37.064,24.164) v1@36.807,23.907
PTC14: S2.1 U1.C6 | length 51.4
  Top Layer w0.102: S2.1@16.216,9.572 28.172,9.572 28.478,9.878 28.478,27.615 28.664,27.8 v1(33.7,27.8) v1@33.706,27.8 ; S2.1@16.371,9.78 ccw(c16.874,10.283) 16.874,9.572 ; S2.1@16.443,9.398 cw(c16.863,8.978) 16.863,9.572 ; S2.1@16.443,9.852 ccw(c17.119,10.528) 17.119,9.572 ; S2.1@16.515,9.326 cw(c17.108,8.733) 17.108,9.572 ; S2.1@16.515,9.924 ccw(c17.365,10.774) 17.365,9.572 ; S2.1@16.587,9.254 cw(c17.353,8.488) 17.353,9.572 ; S2.1@16.587,9.996 ccw(c17.61,11.019) 17.61,9.572 ; v1@33.593,27.693 ccw(c33.336,27.436) 33.336,27.8 ccw(c33.336,28.164) v1@33.593,27.907 ; U1.C6@35.2,23.3 v1(35.7,23.8) ; U1.C6@35.2,23.499 ccw(c35.2,23.98) 35.54,23.64 ccw(c35.88,23.3) U1.C6@35.399,23.3 ; U1.C6@35.295,23.499 ccw(c35.018,23.979) v1@35.554,23.838 ; U1.C6@35.399,23.395 cw(c35.879,23.118) v1@35.738,23.654 ; 35.506,23.62 ccw(c35.349,23.892) v1@35.653,23.812 ; 35.511,23.623 ccw(c35.458,23.715) v1@35.558,23.75 ; 35.52,23.606 cw(c35.792,23.449) v1@35.712,23.753 ; 35.523,23.611 cw(c35.615,23.558) v1@35.65,23.658 ; v1@35.549,23.8 cw(c35.185,23.8) 35.443,23.543 cw(c35.7,23.285) v1@35.7,23.649 ; 35.537,23.638 cw(c35.619,23.496) 35.661,23.654 ccw(c35.619,23.496) 35.537,23.638 ; 35.538,23.637 ccw(c35.396,23.719) 35.554,23.761 cw(c35.396,23.719) 35.538,23.637
  Bottom Layer w0.102: v1@33.606,27.682 cw(c33.454,27.489) 33.7,27.489 ; v1(33.7,27.8) 33.7,27.489 ; v1@33.794,27.682 ccw(c33.946,27.489) 33.7,27.489 ; v1@35.593,23.907 ccw(c35.336,24.164) 35.7,24.164 ccw(c36.064,24.164) v1@35.807,23.907 ; v1(35.7,23.8) 35.7,24.701 35.179,25.222 35.179,26.01 33.7,27.489
PTC15: SW2.6 U1.B6 | length 19.3
  Top Layer w0.102: SW2.6@30.02,11.851 ccw(c29.66,11.537) 29.66,12.015 ; SW2.6@30.02,12.179 cw(c29.66,12.493) 29.66,12.015 ; SW2.6@30.097,11.918 ccw(c29.883,11.732) 29.883,12.015 ccw(c29.883,12.298) SW2.6@30.097,12.112 ; SW2.6@31.008,12.015 29.66,12.015 ; U1.B6@34.001,23.3 cw(c33.52,23.3) 33.86,22.96 cw(c34.2,22.62) U1.B6@34.2,23.101 ; U1.B6@34.2,23.3 33.684,22.784 29.579,22.784 29.325,22.53 29.325,12.35 29.66,12.015
PTC18: SW2.8 U1.C5 | length 17.8
  Top Layer w0.102: SW2.8@30.832,14.731 ccw(c30.406,15.157) 31.008,15.157 ccw(c31.61,15.157) SW2.8@31.184,14.731 ; v1@30.901,15.875 cw(c30.644,15.618) 31.008,15.618 cw(c31.372,15.618) v1@31.115,15.875 ; SW2.8@30.904,14.659 ccw(c30.652,14.911) 31.008,14.911 ccw(c31.364,14.911) SW2.8@31.112,14.659 ; SW2.8@31.008,14.555 v1(31.008,15.982) ; U1.C5@35.2,22.101 cw(c35.2,21.62) 35.54,21.96 cw(c35.88,22.3) U1.C5@35.399,22.3 ; U1.C5@35.2,22.3 v1(35.7,21.8) ; U1.C5@35.295,22.101 cw(c35.018,21.621) v1@35.554,21.762 ; U1.C5@35.399,22.205 ccw(c35.879,22.482) v1@35.738,21.946 ; 35.506,21.98 cw(c35.349,21.708) v1@35.653,21.788 ; 35.511,21.977 cw(c35.458,21.885) v1@35.558,21.85 ; 35.52,21.994 ccw(c35.792,22.151) v1@35.712,21.847 ; 35.523,21.989 ccw(c35.615,22.042) v1@35.65,21.942 ; v1@35.549,21.8 ccw(c35.185,21.8) 35.443,22.057 ccw(c35.7,22.315) v1@35.7,21.951 ; 35.537,21.962 ccw(c35.619,22.104) 35.661,21.946 cw(c35.619,22.104) 35.537,21.962 ; 35.538,21.963 cw(c35.396,21.881) 35.554,21.839 ccw(c35.396,21.881) 35.538,21.963
  Bottom Layer w0.102: v1(31.008,15.982) 31.223,16.197 ; v1@31.028,16.131 ccw(c31.06,16.36) 31.223,16.197 ; v1@31.157,16.002 cw(c31.386,16.034) 31.223,16.197 ; 35.429,21.51 ccw(c35.139,21.8) v1@35.549,21.8 ; 35.476,21.556 cw(c35.7,21.332) v1@35.7,21.649 ; v1(35.7,21.8) 35.7,21.781 33.706,19.787 33.706,16.358 33.545,16.197 31.223,16.197
PTC19: SW2.7 U1.B5 | length 15.7
  Top Layer w0.102: SW2.7@29.989,13.167 ccw(c29.79,13.059) 29.79,13.285 ; SW2.7@29.989,13.403 cw(c29.79,13.511) 29.79,13.285 ; SW2.7@31.008,13.285 29.79,13.285 ; U1.B5@34.001,22.3 cw(c33.52,22.3) 33.86,21.96 cw(c34.2,21.62) U1.B5@34.2,22.101 ; U1.B5@34.2,22.3 33.693,21.793 29.846,21.793 29.6,21.547 29.6,13.475 29.79,13.285
PTD7: P2.1 U1.A1 | length 37.2
  Top Layer w0.102: v1(25.832,8.396) 33.034,8.396 33.2,8.562 U1.A1@33.2,18.3 ; v1@25.938,8.289 cw(c26.196,8.032) 26.196,8.396 cw(c26.196,8.76) v1@25.938,8.503 ; U1.A1@33.059,18.159 cw(c32.719,17.819) 33.2,17.819 cw(c33.681,17.819) U1.A1@33.341,18.159
  Bottom Layer w0.102: P2.1@21.001,2.485 22.25,3.734 22.25,8.077 22.569,8.396 v1(25.832,8.396) ; P2.1@21.001,2.879 ccw(c21.001,3.832) 21.674,3.158 ccw(c22.348,2.485) P2.1@21.395,2.485 ; P2.1@21.001,2.981 ccw(c21.001,4.178) 21.848,3.332 ccw(c22.694,2.485) P2.1@21.497,2.485 ; P2.1@21.001,3.083 ccw(c21.001,4.525) 22.021,3.505 ccw(c23.041,2.485) P2.1@21.599,2.485 ; P2.1@21.001,3.184 ccw(c21.001,4.872) 22.195,3.679 ccw(c23.388,2.485) P2.1@21.7,2.485 ; v1@25.725,8.289 ccw(c25.468,8.032) 25.468,8.396 ccw(c25.468,8.76) v1@25.725,8.503
PTD8: P2.2 U1.C9 | length 45.1
  Top Layer w0.102: P2.2@20.507,5.519 ccw(c19.313,6.713) 21.001,6.713 ccw(c22.689,6.713) P2.2@21.495,5.519 ; P2.2@20.578,5.448 ccw(c19.558,6.468) 21.001,6.468 ccw(c22.444,6.468) P2.2@21.424,5.448 ; P2.2@20.65,5.376 ccw(c19.804,6.222) 21.001,6.222 ccw(c22.198,6.222) P2.2@21.352,5.376 ; P2.2@20.722,5.304 ccw(c20.049,5.977) 21.001,5.977 ccw(c21.953,5.977) P2.2@21.28,5.304 ; P2.2@21.001,5.025 21.001,9.165 21.205,9.369 28.419,9.369 28.681,9.631 28.681,26.649 28.857,26.825 34.638,26.825 35.163,26.3 U1.C9@35.2,26.3 ; 34.796,26.666 ccw(c35.2,27.07) U1.C9@35.2,26.499 ; 34.886,26.576 cw(c34.61,26.3) U1.C9@35.001,26.3 ; 34.97,26.493 ccw(c35.2,26.723) U1.C9@35.2,26.398
PTD9: P2.3 U1.B9 | length 44.7
  Top Layer w0.102: P2.3@22.842,2.485 ccw(c21.154,2.485) 22.347,3.679 ccw(c23.541,4.872) P2.3@23.541,3.184 ; P2.3@22.943,2.485 ccw(c21.501,2.485) 22.521,3.505 ccw(c23.541,4.525) P2.3@23.541,3.083 ; P2.3@23.045,2.485 ccw(c21.848,2.485) 22.694,3.332 ccw(c23.541,4.178) P2.3@23.541,2.981 ; P2.3@23.147,2.485 ccw(c22.194,2.485) 22.868,3.158 ccw(c23.541,3.832) P2.3@23.541,2.879 ; P2.3@23.541,2.485 22.25,3.776 22.25,9.017 22.399,9.165 28.665,9.165 28.885,9.385 28.885,25.583 29.077,25.775 33.675,25.775 U1.B9@34.2,26.3 ; U1.B9@34.001,26.3 cw(c33.52,26.3) 33.86,25.96 cw(c34.2,25.62) U1.B9@34.2,26.101
PTD10: P2.4 U1.B3 | length 34.8
  Top Layer w0.102: P2.4@23.047,5.519 ccw(c21.853,6.713) 23.541,6.713 ccw(c25.229,6.713) P2.4@24.035,5.519 ; P2.4@23.118,5.448 ccw(c22.098,6.468) 23.541,6.468 ccw(c24.984,6.468) P2.4@23.964,5.448 ; P2.4@23.19,5.376 ccw(c22.344,6.222) 23.541,6.222 ccw(c24.738,6.222) P2.4@23.892,5.376 ; P2.4@23.262,5.304 ccw(c22.589,5.977) 23.541,5.977 ccw(c24.493,5.977) P2.4@23.82,5.304 ; P2.4@23.541,5.025 23.541,8.86 23.643,8.962 32.162,8.962 32.385,9.185 32.385,15.773 32.107,16.051 32.107,19.61 32.297,19.8 33.7,19.8 U1.B3@34.2,20.3 ; U1.B3@34.001,20.3 cw(c33.52,20.3) 33.86,19.96 cw(c34.2,19.62) U1.B3@34.2,20.101
PTD11: P2.5 U1.B2 | length 35.1
  Top Layer w0.102: P2.5@25.382,2.485 ccw(c23.694,2.485) 24.887,3.679 ccw(c26.081,4.872) P2.5@26.081,3.184 ; P2.5@25.483,2.485 ccw(c24.041,2.485) 25.061,3.505 ccw(c26.081,4.525) P2.5@26.081,3.083 ; P2.5@25.585,2.485 ccw(c24.388,2.485) 25.234,3.332 ccw(c26.081,4.178) P2.5@26.081,2.981 ; P2.5@25.687,2.485 ccw(c24.734,2.485) 25.408,3.158 ccw(c26.081,3.832) P2.5@26.081,2.879 ; P2.5@26.081,2.485 24.79,3.776 24.79,8.458 25.082,8.75 32.499,8.75 32.639,8.89 32.639,18.466 32.969,18.796 33.696,18.796 U1.B2@34.2,19.3 ; U1.B2@34.001,19.3 cw(c33.52,19.3) 33.86,18.96 cw(c34.2,18.62) U1.B2@34.2,19.101
PTD12: P2.6 U1.B1 | length 29.8
  Top Layer w0.102: P2.6@25.587,5.519 ccw(c24.393,6.713) 26.081,6.713 ccw(c27.769,6.713) P2.6@26.575,5.519 ; P2.6@25.658,5.448 ccw(c24.638,6.468) 26.081,6.468 ccw(c27.524,6.468) P2.6@26.504,5.448 ; P2.6@25.73,5.376 ccw(c24.884,6.222) 26.081,6.222 ccw(c27.278,6.222) P2.6@26.432,5.376 ; P2.6@25.802,5.304 ccw(c25.129,5.977) 26.081,5.977 ccw(c27.033,5.977) P2.6@26.36,5.304 ; P2.6@26.081,5.025 26.081,7.844 26.237,8 33.298,8 33.744,8.445 33.744,17.844 U1.B1@34.2,18.3 ; U1.B1@34.001,18.3 cw(c33.52,18.3) 33.86,17.96 cw(c34.2,17.62) U1.B1@34.2,18.101
PTD13: P2.7 U1.C3 | length 35.4
  Top Layer w0.102: P2.7@28.621,2.485 29.693,3.557 ; P2.7@28.652,2.878 ccw(c28.71,3.605) 29.225,3.089 ccw(c29.741,2.574) P2.7@29.014,2.516 ; P2.7@28.66,2.979 ccw(c28.733,3.893) 29.381,3.245 ccw(c30.03,2.597) P2.7@29.115,2.524 ; P2.7@28.668,3.081 ccw(c28.756,4.182) 29.537,3.401 ccw(c30.318,2.62) P2.7@29.217,2.532 ; P2.7@28.676,3.182 ccw(c28.779,4.471) 29.693,3.557 ; P2.7@29.318,2.54 cw(c30.607,2.643) 29.693,3.557 ; v1@34.593,15.917 cw(c34.336,15.66) 34.7,15.66 cw(c35.064,15.66) v1@34.807,15.917 ; v1@34.662,19.946 ccw(c34.521,20.482) U1.C3@35.001,20.205 ; v1@34.688,19.847 ccw(c34.608,20.151) 34.88,19.994 ; v1(34.7,16.024) 34.7,7.838 34.29,7.428 29.856,7.428 29.693,7.264 29.693,3.557 ; v1(34.7,19.8) U1.C3@35.2,20.3 ; v1@34.7,19.951 ccw(c34.7,20.315) 34.957,20.057 ccw(c35.215,19.8) v1@34.851,19.8 ; v1@34.747,19.788 cw(c35.051,19.708) 34.894,19.98 ; v1@34.75,19.942 ccw(c34.785,20.042) 34.877,19.989 ; v1@34.842,19.85 cw(c34.942,19.885) 34.889,19.977 ; v1@34.846,19.762 cw(c35.382,19.621) U1.C3@35.105,20.101 ; U1.C3@35.001,20.3 cw(c34.52,20.3) 34.86,19.96 cw(c35.2,19.62) U1.C3@35.2,20.101 ; v1@34.739,19.946 ccw(c34.781,20.104) 34.863,19.962 cw(c34.781,20.104) v1@34.739,19.946 ; v1@34.846,19.839 cw(c35.004,19.881) 34.862,19.963 ccw(c35.004,19.881) v1@34.846,19.839
  Bottom Layer w0.102: v1@34.593,16.13 ccw(c34.336,16.388) 34.7,16.388 ccw(c35.064,16.388) v1@34.807,16.13 ; v1@34.593,19.693 cw(c34.336,19.436) 34.7,19.436 cw(c35.064,19.436) v1@34.807,19.693 ; v1(34.7,16.024) v1(34.7,19.8)
PTD14: P2.8 U1.C2 | length 28.8
  Top Layer w0.102: P2.8@28.127,5.519 ccw(c26.933,6.713) 28.621,6.713 ccw(c30.309,6.713) P2.8@29.115,5.519 ; P2.8@28.198,5.448 ccw(c27.178,6.468) 28.621,6.468 ccw(c30.064,6.468) P2.8@29.044,5.448 ; P2.8@28.27,5.376 ccw(c27.424,6.222) 28.621,6.222 ccw(c29.818,6.222) P2.8@28.972,5.376 ; P2.8@28.342,5.304 ccw(c27.669,5.977) 28.621,5.977 ccw(c29.573,5.977) P2.8@28.9,5.304 ; P2.8@28.621,5.025 28.621,7.183 29.134,7.696 33.909,7.696 34.188,7.976 34.188,16.154 34.798,16.764 34.798,18.898 U1.C2@35.2,19.3 ; U1.C2@35.001,19.3 cw(c34.52,19.3) 34.86,18.96 cw(c35.2,18.62) U1.C2@35.2,19.101
PTD15: P2.9 U1.C1 | length 30.3
  Top Layer w0.102: P2.9@30.462,2.485 ccw(c28.774,2.485) 29.967,3.679 ccw(c31.161,4.872) P2.9@31.161,3.184 ; P2.9@30.563,2.485 ccw(c29.121,2.485) 30.141,3.505 ccw(c31.161,4.525) P2.9@31.161,3.083 ; P2.9@30.665,2.485 ccw(c29.468,2.485) 30.314,3.332 ccw(c31.161,4.178) P2.9@31.161,2.981 ; P2.9@30.767,2.485 ccw(c29.814,2.485) 30.488,3.158 ccw(c31.161,3.832) P2.9@31.161,2.879 ; P2.9@31.161,2.485 29.9,3.746 29.9,7.116 30.009,7.225 34.7,7.225 35.2,7.725 U1.C1@35.2,18.3 ; U1.C1@35.059,18.159 cw(c34.719,17.819) 35.2,17.819 cw(c35.681,17.819) U1.C1@35.341,18.159
PTE0: SD*2.8 U1.D3 | length 52
  Top Layer w0.102: SD*2.8@5.879,5.709 ccw(c5.562,6.175) v1(6.125,6.175) SD*2.8@6.125,5.265 ; SD*2.8@5.936,5.625 ccw(c5.692,5.983) v1@6.125,5.983 ; v1@6.009,6.079 cw(c5.85,5.947) 6.05,5.893 cw(c6.249,5.84) v1@6.177,6.034 ; v1@6.018,6.068 cw(c5.761,5.811) 6.125,5.811 cw(c6.489,5.811) v1@6.232,6.068 ; v1@6.025,6.062 cw(c5.886,5.904) 6.089,5.85 ; v1@6.05,6.044 cw(c5.947,5.866) 6.145,5.92 ; 6.11,5.927 cw(c6.297,5.876) v1@6.2,6.044 ; v1@6.125,5.996 ccw(c6.581,5.996) SD*2.8@6.259,5.674 ; 6.165,5.846 cw(c6.38,5.903) v1@6.228,6.065 ; v1@35.662,19.946 ccw(c35.521,20.482) U1.D3@36.001,20.205 ; v1@35.688,19.847 ccw(c35.608,20.151) 35.88,19.994 ; v1(35.7,19.8) U1.D3@36.2,20.3 ; v1@35.7,19.951 ccw(c35.7,20.315) 35.957,20.057 ccw(c36.215,19.8) v1@35.851,19.8 ; v1@35.747,19.788 cw(c36.051,19.708) 35.894,19.98 ; v1@35.75,19.942 ccw(c35.785,20.042) 35.877,19.989 ; v1@35.842,19.85 cw(c35.942,19.885) 35.889,19.977 ; v1@35.846,19.762 cw(c36.382,19.621) U1.D3@36.105,20.101 ; U1.D3@36.001,20.3 cw(c35.52,20.3) 35.86,19.96 cw(c36.2,19.62) U1.D3@36.2,20.101 ; v1@35.739,19.946 ccw(c35.781,20.104) 35.863,19.962 cw(c35.781,20.104) v1@35.739,19.946 ; v1@35.846,19.839 cw(c36.004,19.881) 35.862,19.963 ccw(c36.004,19.881) v1@35.846,19.839
  Bottom Layer w0.102: v1@6.018,6.282 ccw(c5.761,6.539) 6.125,6.539 ccw(c6.489,6.539) v1@6.232,6.282 ; v1(6.125,6.175) 6.125,14.975 6.341,15.191 34.927,15.191 35.103,15.367 35.103,19.203 v1(35.7,19.8) ; v1@35.549,19.8 cw(c35.185,19.8) 35.443,19.543 cw(c35.7,19.285) v1@35.7,19.649
PTE1: SD*2.7 U1.D2 | length 50.5
  Top Layer w0.102: SD*2.7@6.935,5.674 ccw(c6.469,6.14) v1@7.129,6.14 ; v1@7.002,6.093 cw(c6.722,5.912) 7.044,5.825 ; SD*2.7@7.007,5.602 ccw(c6.714,5.895) 7.129,5.895 ; v1@7.022,6.068 cw(c6.765,5.811) 7.129,5.811 cw(c7.492,5.811) v1@7.235,6.068 ; 7.049,5.842 cw(c7.37,5.756) v1@7.204,6.044 ; v1@7.059,6.041 cw(c6.916,5.764) 7.217,5.845 cw(c7.518,5.926) v1@7.255,6.094 ; SD*2.7@7.129,5.205 v1(7.129,6.175) ccw(c7.788,6.175) SD*2.7@7.347,5.684 ; 7.129,5.947 ccw(c7.583,5.947) SD*2.7@7.279,5.609 ; v1@35.662,18.946 ccw(c35.521,19.482) U1.D2@36.001,19.205 ; v1@35.688,18.847 ccw(c35.608,19.151) 35.88,18.994 ; v1(35.7,18.8) U1.D2@36.2,19.3 ; v1@35.7,18.951 ccw(c35.7,19.315) 35.957,19.057 ccw(c36.215,18.8) v1@35.851,18.8 ; v1@35.747,18.788 cw(c36.051,18.708) 35.894,18.98 ; v1@35.75,18.942 ccw(c35.785,19.042) 35.877,18.989 ; v1@35.842,18.85 cw(c35.942,18.885) 35.889,18.977 ; v1@35.846,18.762 cw(c36.382,18.621) U1.D2@36.105,19.101 ; U1.D2@36.001,19.3 cw(c35.52,19.3) 35.86,18.96 cw(c36.2,18.62) U1.D2@36.2,19.101 ; v1@35.739,18.946 ccw(c35.781,19.104) 35.863,18.962 cw(c35.781,19.104) v1@35.739,18.946 ; v1@35.846,18.839 cw(c36.004,18.881) 35.862,18.963 ccw(c36.004,18.881) v1@35.846,18.839
  Bottom Layer w0.102: v1@7.022,6.282 ccw(c6.765,6.539) 7.129,6.539 ccw(c7.492,6.539) v1@7.235,6.282 ; v1@7.125,6.325 v1@7.129,6.321 ; v1(7.129,6.175) v1@7.129,6.321 ; v1@35.549,18.8 cw(c35.185,18.8) 35.443,18.543 cw(c35.7,18.285) v1@35.7,18.649 ; v1@35.8,18.9 35.331,18.431 35.331,15.168 35.151,14.988 7.563,14.988 7.129,14.554 v1@7.129,6.321
PTE2: SD*2.5 U1.D1 | length 46.6
  Top Layer w0.102: SD*2.5@9.135,5.674 ccw(c8.652,6.157) v1@9.336,6.157 ; SD*2.5@9.207,5.602 ccw(c8.897,5.912) 9.336,5.912 ; v1@9.207,6.097 cw(c8.907,5.914) 9.246,5.823 ; v1@9.229,6.068 cw(c8.972,5.811) 9.336,5.811 cw(c9.7,5.811) v1@9.442,6.068 ; 9.249,5.833 cw(c9.585,5.743) v1@9.411,6.044 ; v1@9.264,6.042 cw(c9.108,5.752) 9.426,5.838 cw(c9.744,5.923) v1@9.464,6.096 ; SD*2.5@9.336,5.198 v1(9.336,6.175) ccw(c10.01,6.175) SD*2.5@9.551,5.681 ; 9.336,5.942 ccw(c9.793,5.942) SD*2.5@9.482,5.607 ; v1@35.63,17.685 ccw(c35.57,17.8) 35.7,17.8 ; v1@35.647,17.551 cw(c36.121,17.551) 35.786,17.886 ; v1(35.7,17.551) 35.7,17.8 ; v1@35.749,17.551 cw(c36.468,17.551) 35.96,18.06 ; v1@35.77,17.685 cw(c35.83,17.8) 35.7,17.8 ; v1@35.851,17.551 cw(c36.815,17.551) U1.D1@36.133,18.233 ; U1.D1@36.001,18.3 cw(c35.52,18.3) 35.86,17.96 cw(c36.2,17.62) U1.D1@36.2,18.101 ; U1.D1@36.2,18.3 35.7,17.8
  Bottom Layer w0.102: v1@9.229,6.282 ccw(c8.972,6.539) 9.336,6.539 ccw(c9.7,6.539) v1@9.442,6.282 ; v1(9.336,6.175) 9.336,14.311 9.81,14.785 35.46,14.785 35.7,15.024 v1(35.7,17.551) ; v1@35.593,17.445 cw(c35.336,17.188) 35.7,17.188 cw(c36.064,17.188) v1@35.807,17.445
PTE3: SD*2.3 U1.E4 | length 48.8
  Top Layer w0.102: SD*2.3@11.335,5.674 ccw(c10.835,6.174) v1(11.543,6.175) ; SD*2.3@11.407,5.602 ccw(c11.08,5.929) 11.543,5.929 ; v1@11.412,6.1 cw(c11.097,5.917) 11.449,5.823 ; v1@11.436,6.068 cw(c11.179,5.811) 11.543,5.811 cw(c11.907,5.811) v1@11.649,6.068 ; 11.449,5.824 cw(c11.8,5.73) v1@11.618,6.044 ; v1@11.469,6.044 cw(c11.299,5.74) 11.635,5.83 cw(c11.972,5.92) v1@11.672,6.098 ; SD*2.3@11.543,5.191 v1(11.543,6.175) ; 11.543,5.936 ccw(c12.003,5.936) SD*2.3@11.684,5.604 ; SD*2.3@11.754,5.678 cw(c12.233,6.175) v1(11.543,6.175) ; v1@36.662,20.946 ccw(c36.521,21.482) U1.E4@37.001,21.205 ; v1@36.688,20.847 ccw(c36.608,21.151) 36.88,20.994 ; v1(36.7,20.8) U1.E4@37.2,21.3 ; v1@36.7,20.951 ccw(c36.7,21.315) 36.957,21.057 ccw(c37.215,20.8) v1@36.851,20.8 ; v1@36.747,20.788 cw(c37.051,20.708) 36.894,20.98 ; v1@36.75,20.942 ccw(c36.785,21.042) 36.877,20.989 ; v1@36.842,20.85 cw(c36.942,20.885) 36.889,20.977 ; v1@36.846,20.762 cw(c37.382,20.621) U1.E4@37.105,21.101 ; U1.E4@37.001,21.3 cw(c36.52,21.3) 36.86,20.96 cw(c37.2,20.62) U1.E4@37.2,21.101 ; v1@36.739,20.946 ccw(c36.781,21.104) 36.863,20.962 cw(c36.781,21.104) v1@36.739,20.946 ; v1@36.846,20.839 cw(c37.004,20.881) 36.862,20.963 ccw(c37.004,20.881) v1@36.846,20.839
  Bottom Layer w0.102: v1@11.436,6.282 ccw(c11.179,6.539) 11.543,6.539 ccw(c11.907,6.539) v1@11.649,6.282 ; v1(11.543,6.175) 11.543,14.293 11.831,14.581 35.79,14.581 36.068,14.859 36.068,20.168 v1@36.6,20.7 ; v1@36.549,20.8 cw(c36.185,20.8) 36.443,20.543 cw(c36.7,20.285) v1@36.7,20.649
PTE4: SD*2.2 U1.E3 | length 47.1
  Top Layer w0.102: SD*2.2@12.437,5.675 ccw(c11.945,6.175) v1(12.646,6.175) ; SD*2.2@12.508,5.603 ccw(c12.184,5.932) 12.646,5.932 ; v1@12.516,6.099 cw(c12.203,5.918) 12.552,5.824 cw(c12.902,5.731) v1@12.722,6.044 ; v1@12.54,6.068 cw(c12.283,5.811) 12.646,5.811 cw(c13.01,5.811) v1@12.753,6.068 ; v1@12.572,6.044 cw(c12.394,5.733) 12.74,5.826 cw(c13.086,5.918) v1@12.777,6.099 ; SD*2.2@12.647,5.187 v1(12.646,6.175) ; 12.646,5.933 ccw(c13.108,5.933) SD*2.2@12.785,5.603 ; SD*2.2@12.856,5.676 cw(c13.345,6.175) v1(12.646,6.175) ; v1@36.662,19.946 ccw(c36.521,20.482) U1.E3@37.001,20.205 ; v1@36.688,19.847 ccw(c36.608,20.151) 36.88,19.994 ; v1(36.7,19.8) U1.E3@37.2,20.3 ; v1@36.7,19.951 ccw(c36.7,20.315) 36.957,20.057 ccw(c37.215,19.8) v1@36.851,19.8 ; v1@36.747,19.788 cw(c37.051,19.708) 36.894,19.98 ; v1@36.75,19.942 ccw(c36.785,20.042) 36.877,19.989 ; v1@36.842,19.85 cw(c36.942,19.885) 36.889,19.977 ; v1@36.846,19.762 cw(c37.382,19.621) U1.E3@37.105,20.101 ; U1.E3@37.001,20.3 cw(c36.52,20.3) 36.86,19.96 cw(c37.2,19.62) U1.E3@37.2,20.101 ; v1@36.739,19.946 ccw(c36.781,20.104) 36.863,19.962 cw(c36.781,20.104) v1@36.739,19.946 ; v1@36.846,19.839 cw(c37.004,19.881) 36.862,19.963 ccw(c37.004,19.881) v1@36.846,19.839
  Bottom Layer w0.102: v1@12.54,6.282 ccw(c12.283,6.539) 12.646,6.539 ccw(c13.01,6.539) v1@12.753,6.282 ; v1(12.646,6.175) 12.646,14.096 12.928,14.378 36.117,14.378 36.297,14.557 36.297,19.397 v1(36.7,19.8) ; v1@36.549,19.8 cw(c36.185,19.8) 36.443,19.543 cw(c36.7,19.285) v1@36.7,19.649
PTE5: SD*2.1 U1.E2 | length 45
  Top Layer w0.102: SD*2.1@13.539,5.677 ccw(c13.057,6.175) v1(13.75,6.175) ; SD*2.1@13.61,5.604 ccw(c13.289,5.935) 13.75,5.935 ; v1@13.62,6.098 cw(c13.318,5.919) 13.657,5.828 cw(c13.997,5.737) v1@13.824,6.044 ; v1@13.643,6.068 cw(c13.386,5.811) 13.75,5.811 cw(c14.114,5.811) v1@13.857,6.068 ; v1@13.675,6.044 cw(c13.493,5.729) 13.844,5.824 ; SD*2.1@13.75,5.19 v1(13.75,6.175) ; 13.75,5.93 ccw(c14.213,5.93) SD*2.1@13.886,5.602 ; 13.844,5.824 cw(c14.196,5.918) v1@13.88,6.1 ; SD*2.1@13.958,5.674 cw(c14.457,6.175) v1(13.75,6.175) ; v1@36.662,18.946 ccw(c36.521,19.482) U1.E2@37.001,19.205 ; v1@36.688,18.847 ccw(c36.608,19.151) 36.88,18.994 ; v1(36.7,18.8) U1.E2@37.2,19.3 ; v1@36.7,18.951 ccw(c36.7,19.315) 36.957,19.057 ccw(c37.215,18.8) v1@36.851,18.8 ; v1@36.747,18.788 cw(c37.051,18.708) 36.894,18.98 ; v1@36.75,18.942 ccw(c36.785,19.042) 36.877,18.989 ; v1@36.842,18.85 cw(c36.942,18.885) 36.889,18.977 ; v1@36.846,18.762 cw(c37.382,18.621) U1.E2@37.105,19.101 ; U1.E2@37.001,19.3 cw(c36.52,19.3) 36.86,18.96 cw(c37.2,18.62) U1.E2@37.2,19.101 ; v1@36.739,18.946 ccw(c36.781,19.104) 36.863,18.962 cw(c36.781,19.104) v1@36.739,18.946 ; v1@36.846,18.839 cw(c37.004,18.881) 36.862,18.963 ccw(c37.004,18.881) v1@36.846,18.839
  Bottom Layer w0.102: v1@13.643,6.282 ccw(c13.386,6.539) 13.75,6.539 ccw(c14.114,6.539) v1@13.857,6.282 ; v1(13.75,6.175) 13.75,13.875 14.05,14.175 36.273,14.175 36.7,14.602 v1(36.7,18.8) ; v1@36.593,18.693 cw(c36.336,18.436) 36.7,18.436 cw(c37.064,18.436) v1@36.807,18.693
PTE24: BT1.1 P1.15 U1.M4 U6.39 | length 66.1
  Top Layer w0.102: U1.M4@44.2,21.3 44.522,20.978 ; U1.M4@44.208,21.101 cw(c44.225,20.681) 44.522,20.978 ; U1.M4@44.399,21.292 ccw(c44.819,21.275) 44.522,20.978 ; BT1.1@49.148,17.689 ccw(c48,16.578) 48,18.175 ; BT1.1@49.148,18.661 cw(c48,19.772) 48,18.175 ; BT1.1@49.221,17.759 ccw(c48.24,16.81) 48.24,18.175 ccw(c48.24,19.54) BT1.1@49.221,18.591 ; BT1.1@49.294,17.83 ccw(c48.48,17.042) 48.48,18.175 ccw(c48.48,19.308) BT1.1@49.294,18.52 ; BT1.1@49.367,17.901 ccw(c48.719,17.274) 48.719,18.175 ccw(c48.719,19.076) BT1.1@49.367,18.449 ; BT1.1@49.65,17.476 cw(c49.65,15.788) 50.844,16.981 cw(c52.037,18.175) BT1.1@50.349,18.175 ; BT1.1@49.65,17.577 cw(c49.65,16.135) 50.67,17.155 cw(c51.69,18.175) BT1.1@50.248,18.175 ; BT1.1@49.65,17.679 cw(c49.65,16.482) 50.497,17.328 cw(c51.343,18.175) BT1.1@50.146,18.175 ; BT1.1@49.65,17.781 cw(c49.65,16.828) 50.323,17.502 cw(c50.997,18.175) BT1.1@50.044,18.175 ; v1@59.243,7.493 cw(c58.986,7.236) 59.35,7.236 cw(c59.714,7.236) v1@59.457,7.493 ; v1@59.243,15.943 ccw(c58.986,15.686) 58.986,16.05 ccw(c58.986,16.414) v1@59.243,16.157 ; v1(59.35,7.6) 59.35,3.76 P1.15@60.625,2.485 ; v1@59.457,15.943 cw(c59.714,15.686) 59.714,16.05 cw(c59.714,16.414) v1@59.457,16.157 ; P1.15@59.926,2.485 ccw(c58.238,2.485) 59.431,3.679 ccw(c60.625,4.872) P1.15@60.625,3.184 ; P1.15@60.027,2.485 ccw(c58.585,2.485) 59.605,3.505 ccw(c60.625,4.525) P1.15@60.625,3.083 ; P1.15@60.129,2.485 ccw(c58.932,2.485) 59.778,3.332 ccw(c60.625,4.178) P1.15@60.625,2.981 ; P1.15@60.231,2.485 ccw(c59.278,2.485) 59.952,3.158 ccw(c60.625,3.832) P1.15@60.625,2.879 ; U6.39@62.905,16.58 cw(c62.736,16.411) 62.975,16.411 cw(c63.214,16.411) U6.39@63.045,16.58 ; U6.39@62.975,17.325 62.975,16.275 62.75,16.05 51.775,16.05 BT1.1@49.65,18.175 48,18.175 ; 44.522,20.978 47.647,20.978 47.829,20.796 47.829,18.346 48,18.175
  Bottom Layer w0.102: v1@59.243,7.707 ccw(c58.986,7.964) 59.35,7.964 ccw(c59.714,7.964) v1@59.457,7.707 ; v1@59.243,15.943 cw(c58.986,15.686) 59.35,15.686 cw(c59.714,15.686) v1@59.457,15.943 ; v1(59.35,7.6) v1(59.35,16.05)